# EAGLE board Jung (EAGLE 8.0.2)
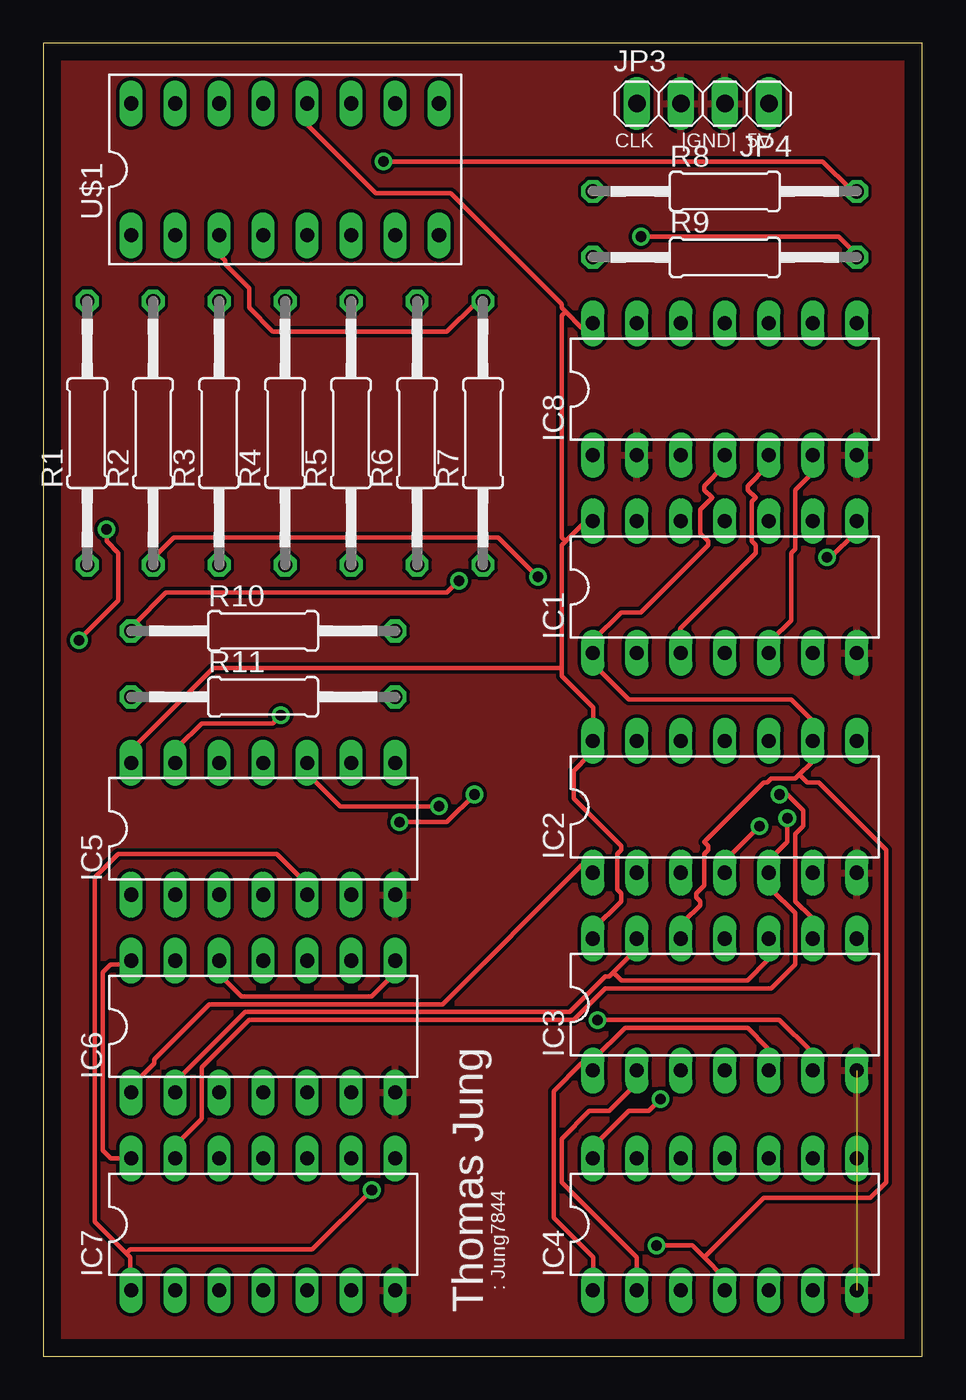
[diagram p0: board, top side]
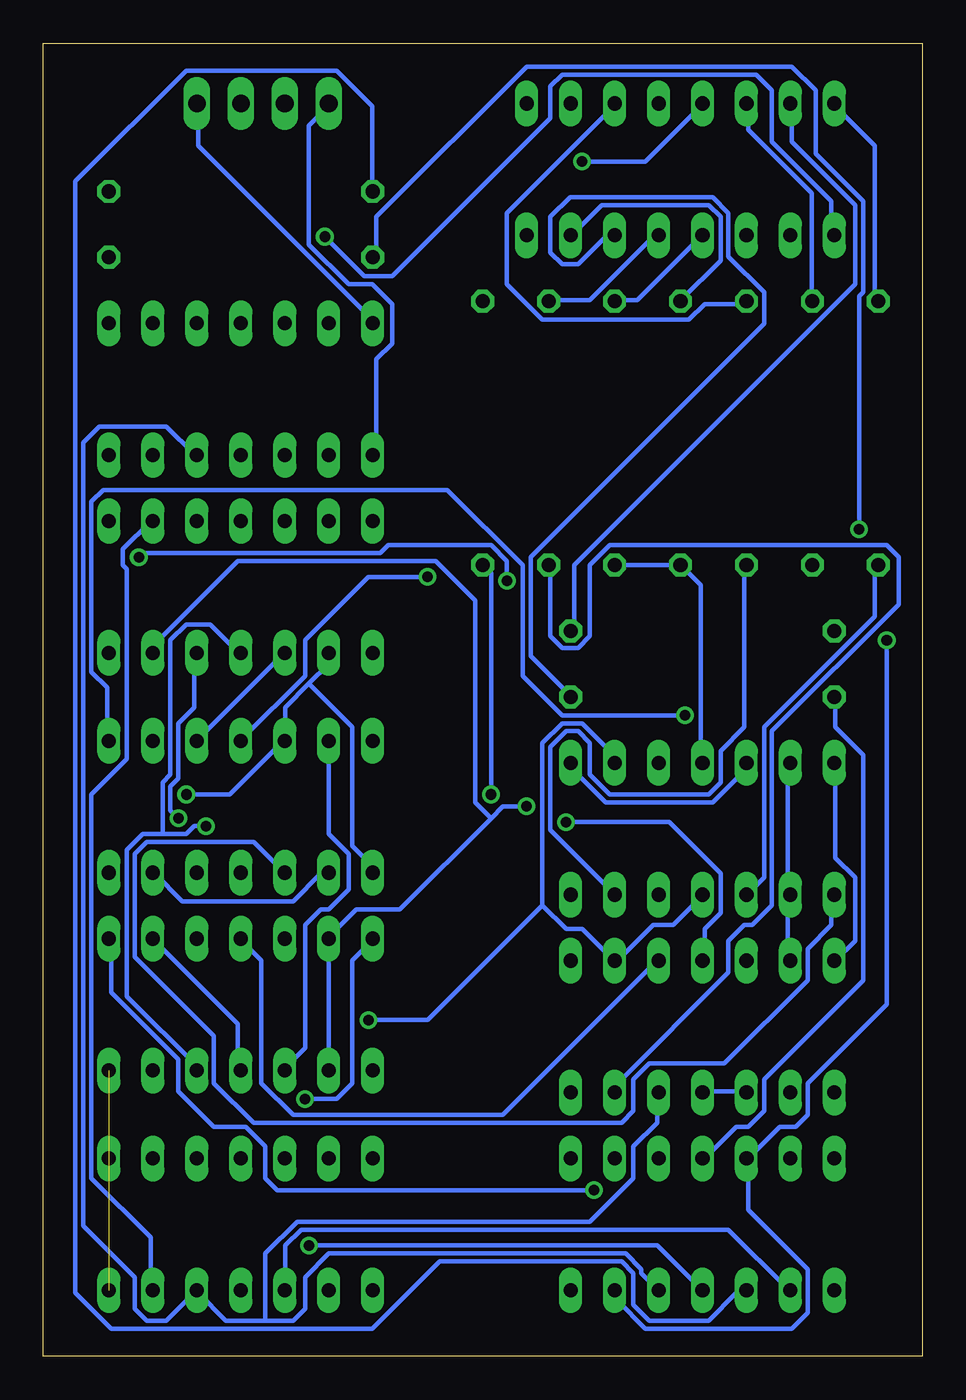
[diagram p1: board, bottom side, seen from below]

Size 50.78 x 75.87 mm. Coordinates in mm from the lower left corner, seen from the top.
Outline: 0,0 50.78,0 50.78,75.87 0,75.87 0,0
Copper layers (1*16): Top 0.035mm / dielectric 1.5mm / Bottom 0.035mm
Design rules "default": minimum track width 10mil, minimum drill 24mil, track to track 8mil, track to pad 8mil, pad to pad 8mil, via to via 8mil, smd to smd 8mil, copper to edge 40mil, drill to drill 8mil, minimum pad ring 10mil, minimum via ring 8mil, stop-mask expansion 4mil, vias tented up to drill 0mil, thermal gap 10mil

## Footprints (pad centres in the part's own frame; a part is rotated, then mirrored left to right if it is on the bottom)
DIL14 = drill 0.813 long: 1 -7.62,-3.81; 2 -5.08,-3.81; 3 -2.54,-3.81; 4 0,-3.81; 5 2.54,-3.81; 6 5.08,-3.81; 7 7.62,-3.81; 8 7.62,3.81; 9 5.08,3.81; 10 2.54,3.81; 11 0,3.81; 12 -2.54,3.81; 13 -5.08,3.81; 14 -7.62,3.81
1X02 = drill 1.016 long: 1 -1.27,0; 2 1.27,0
0207/15 = drill 0.813 octagon: 1 -7.62,0; 2 7.62,0
DIL16 = drill 0.813 long: 1 -8.89,-3.81; 2 -6.35,-3.81; 3 -3.81,-3.81; 4 -1.27,-3.81; 5 1.27,-3.81; 6 3.81,-3.81; 7 6.35,-3.81; 8 8.89,-3.81; 9 8.89,3.81; 10 6.35,3.81; 11 3.81,3.81; 12 1.27,3.81; 13 -1.27,3.81; 14 -3.81,3.81; 15 -6.35,3.81; 16 -8.89,3.81

## Placement (x,y rotation side)
IC1  74ALS04N  [DIL14]  39.37,44.45 0 top
IC2  74ALS08N  [DIL14]  39.37,31.75 0 top
IC3  74ALS08N  [DIL14]  39.37,20.32 0 top
IC4  74ALS08N  [DIL14]  39.37,7.62 0 top
IC5  74LS32N  [DIL14]  12.7,30.48 0 top
IC6  74LS32N  [DIL14]  12.7,19.05 0 top
IC7  74LS32N  [DIL14]  12.7,7.62 0 top
IC8  74LS393N  [DIL14]  39.37,55.88 0 top
JP3  [1X02]  35.56,72.39 0 top
JP4  [1X02]  40.64,72.39 180 top
R1  270  [0207/15]  2.54,53.34 90 top
R2  270  [0207/15]  6.35,53.34 90 top
R3  270  [0207/15]  10.16,53.34 90 top
R4  270  [0207/15]  13.97,53.34 90 top
R5  270  [0207/15]  17.78,53.34 90 top
R6  270  [0207/15]  21.59,53.34 90 top
R7  270  [0207/15]  25.4,53.34 90 top
R8  270  [0207/15]  39.37,67.31 0 top
R9  270  [0207/15]  39.37,63.5 0 top
R10  270  [0207/15]  12.7,41.91 0 top
R11  270  [0207/15]  12.7,38.1 0 top
U$1  PSA39-21EWA  [DIL16]  13.97,68.58 0 top

## Library data of the parts
IC1-IC8 = 74xx-us
JP3 JP4 = pinhead
R1-R11 = resistor
U$1 = ECE3773

## Nets
GND: IC1.7 IC2.7 IC3.7 IC4.7 IC5.7 IC6.7 IC7.7 IC8.2 IC8.7 JP3.2 JP4.2
N$1: IC1.1 IC2.9 IC3.12 IC4.4 IC7.4 IC8.4
N$2: IC1.3 IC2.10 IC4.5 IC6.5 IC7.5 IC8.5
N$3: IC1.5 IC2.5 IC7.13 IC8.6
N$4: IC1.2 IC2.1 IC2.12 IC3.4 IC3.9 IC6.1
N$5: IC1.4 IC2.4 IC3.1 IC3.5 IC4.1
N$6: IC1.6 IC3.2 IC3.10 IC3.13 IC4.2 IC5.10 IC6.2
N$7: IC2.8 IC5.2 IC5.13 IC6.13
N$8: IC3.6 IC5.4 IC5.9 IC6.9
N$9: IC2.13 IC3.3
N$10: IC3.8 IC5.5 IC7.1
N$11: IC2.2 IC2.6
N$12: IC2.3 IC5.1
N$13: IC5.3 R1.1
N$14: IC5.8 IC5.12
N$15: R1.2 U$1.16
N$16: IC6.3 IC6.4
N$17: IC3.11 IC6.10
N$18: IC6.8 IC6.12
N$19: IC2.11 R2.1
N$20: IC4.3 IC7.2
N$21: IC1.9 IC4.6
N$22: IC7.6 IC7.12 R9.1
N$23: R2.2 U$1.14
N$24: IC5.6 R3.1
N$25: R3.2 U$1.11
N$26: IC5.11 R4.1 R5.1
N$27: R4.2 U$1.7
N$28: IC6.6 R6.1
N$29: R5.2 U$1.4
N$30: R6.2 U$1.5
N$31: IC6.11 R7.1
N$32: R7.2 U$1.3
N$33: IC7.3 R8.1
N$34: R8.2 U$1.13
N$35: R9.2 U$1.1
N$36: IC1.8 R10.1
N$37: IC7.11 R11.1
N$38: R10.2 U$1.15
N$39: R11.2 U$1.6
N$40: IC8.1 JP3.1
VCC: IC1.14 IC2.14 IC3.14 IC4.14 IC5.14 IC6.14 IC7.14 IC8.14 JP4.1 U$1.12

## Tracks (layer width: path | path; a pad name or v marks a point on that pad's centre or on a via)
GND  (1 unrouted)
  pour Top: 0,76.2 0,0 50.8,0 50.8,76.2
N$1  (via drill 0.61)
  Top 0.254: v35.43,6.4 37.49,6.4 38.18,5.71 | 38.18,5.71 39.32,4.57 39.32,3.89 IC4.4 | 43.66,33.6 44.35,34.29 44.35,35.43 IC2.9 44.35,35.66 44.35,36.8 43.2,37.95 33.83,37.95 31.77,40.01 31.77,40.46 IC1.1 31.77,40.69 31.77,41.38 33.38,42.98 34.52,42.98 38.41,46.86 38.41,47.09 37.95,47.55 37.95,48.92 38.63,49.61 38.18,50.06 38.18,50.29 39.32,51.44 39.32,51.89 IC8.4 | 43.66,33.6 43.43,33.38 42.06,33.38 41.83,33.15 41.6,33.15 38.18,29.72 38.41,29.49 38.41,29.26 38.18,29.03 38.18,27.2 37.72,26.75 37.72,26.52 37.95,26.29 37.95,26.06 37.03,25.15 37.03,24.23 IC3.12 | 38.18,5.71 41.6,9.14 47.78,9.14 48.69,10.06 48.69,29.26 44.81,33.15 44.12,33.15 43.66,33.6
  Bottom 0.254: v35.43,6.4 15.32,6.4 12.8,3.89 IC7.4
N$2
  Top 0.254: IC8.5 41.83,51.89 41.83,51.44 40.69,50.29 40.69,50.06 41.15,49.61 40.92,49.38 40.92,47.09 41.15,46.86 41.15,46.41 36.8,42.06 36.8,40.69 IC1.3
  Bottom 0.254: IC2.10 41.83,35.66 37.03,40.46 IC1.3 | IC7.5 16.23,4.8 16.23,5.03 17.14,5.94 34.29,5.94 35.66,4.57 35.66,2.74 36.35,2.06 37.95,2.06 | 37.95,2.06 40.23,2.06 41.83,3.66 IC4.5 43.66,2.06 44.81,2.06 45.49,2.74 45.49,4.57 48.46,7.54 48.46,52.81 47.55,53.72 43.66,53.72 42.06,52.12 IC8.5 | 37.95,2.06 37.95,5.94 36.12,7.77 19.2,7.77 16.69,10.29 16.69,12.12 15.32,13.49 15.32,15.09 IC6.5
N$3  (via drill 0.61)
  Top 0.254: IC1.5 42.06,40.69 42.06,41.38 43.2,42.52 43.2,46.41 43.43,46.63 43.43,50.06 44.35,50.98 44.35,51.89 IC8.6 | IC7.13 7.77,11.43 7.77,12.34 9.14,13.72 9.14,16.69 11.89,19.43 30.63,19.43 32.46,21.26 42.06,21.26 43.43,22.63 43.43,25.6 42.06,26.98 42.06,27.89 IC2.5 42.06,28.12 42.06,28.8 42.98,29.72 v42.98,31.09
  Bottom 0.254: v42.98,31.09 43.43,31.55 43.43,32.92 42.98,33.38 42.98,36.58 42.06,37.49 42.06,40.46 IC1.5
N$4  (via drill 0.61)
  Top 0.254: IC6.1 5.26,15.32 5.26,15.77 6.4,16.92 6.4,17.14 9.6,20.34 23.09,20.34 31.09,28.35 31.32,28.35 31.55,28.12 IC2.1 | v42.52,32.46 42.98,32.46 43.89,31.55 43.89,30.63 43.43,30.18 43.43,26.29 44.35,25.38 44.35,24.23 IC3.9
  Bottom 0.254: IC3.4 39.55,16.69 39.55,19.2 44.35,24 IC3.9 | 35.43,38.86 34.29,40.01 IC1.2 | 35.43,38.86 36.8,37.49 36.8,35.66 IC2.12 37.03,35.43 40.01,32.46 v42.52,32.46 | 35.43,38.86 32.92,36.35 32.92,29.49 31.55,28.12 IC2.1
N$5  (via drill 0.61)
  Top 0.254: IC4.1 31.77,3.89 31.77,5.71 29.49,8 29.49,15.32 31.09,16.92 31.32,16.92 31.55,16.69 IC3.1 31.77,16.69 31.77,17.14 33.6,18.97 40.69,18.97 41.83,17.83 41.83,16.69 IC3.5 | v41.38,30.63 39.55,28.8 39.55,28.12 IC2.4
  Bottom 0.254: v41.38,30.63 42.06,30.63 42.52,30.18 43.89,30.18 | 43.89,30.18 45.03,30.18 45.95,29.26 45.95,20.8 41.83,16.69 IC3.5 | 43.89,30.18 43.89,33.15 43.43,33.6 43.43,41.38 42.52,42.29 41.15,42.29 39.55,40.69 IC1.4
N$6  (via drill 0.61)
  Top 0.254: IC4.2 34.29,5.71 29.95,10.06 29.95,12.57 31.55,14.17 32.69,14.17 34.29,15.77 IC3.2 | 32.92,22.17 34.29,23.55 IC3.13 | 32.92,22.17 32.69,21.95 32.46,21.95 30.4,19.89 11.66,19.89 7.77,16 7.77,15.32 IC6.2 | v22.86,31.77 17.14,31.77 15.32,33.6 15.32,34.29 IC5.10 | 32.92,22.17 33.38,21.72 40.69,21.72 41.83,22.86 41.83,24 IC3.10
  Bottom 0.254: v22.86,31.77 24.23,31.77 24.92,31.09 | 24.92,31.09 30.18,25.83 32.69,25.83 34.29,24.23 IC3.13 IC3.2 | 24.92,31.09 25.83,32 25.83,43.66 28.12,45.95 39.55,45.95 44.35,41.15 44.35,40.69 IC1.6
N$7  (via drill 0.61)
  Top 0.254: v13.72,37.03 13.26,36.58 9.14,36.58 7.77,35.2 7.77,34.29 IC5.13
  Bottom 0.254: IC6.13 7.77,22.86 7.77,26.52 IC5.2 7.77,26.75 7.77,34.29 IC5.13 | v13.72,37.03 20.8,37.03 23.09,39.32 23.09,45.72 27.43,50.06 47.32,50.06 48.01,49.38 48.01,39.55 47.09,38.63 47.09,35.66 IC2.8
N$8  (via drill 0.61)
  Top 0.254: v32,19.43 42.52,19.43 44.35,17.6 44.35,16.69 IC3.6
  Bottom 0.254: IC5.4 12.8,26.52 14.4,24.92 15.54,24.92 17.6,22.86 IC6.9 17.83,22.86 19.66,24.69 20.57,24.69 21.95,26.06 | 21.95,26.06 21.95,35.43 20.8,36.58 19.66,36.58 17.83,34.75 17.83,34.29 IC5.9 | v32,19.43 28.57,19.43 21.95,26.06
N$9
  Bottom 0.254: IC2.13 34.29,30.18 33.15,29.03 33.15,26.98 34.29,25.83 34.75,25.83 35.66,24.92 35.66,17.83 36.8,16.69 IC3.3
N$10  (via drill 0.61)
  Top 0.254: 4.8,5.94 2.97,7.77 2.97,27.66 4.34,29.03 13.49,29.03 15.09,27.43 15.09,26.75 IC5.5 | 4.8,5.94 5.03,5.71 5.03,3.89 IC7.1 | v18.97,9.6 15.54,6.17 5.03,6.17 4.8,5.94
  Bottom 0.254: v18.97,9.6 37.26,9.6 37.95,10.29 37.95,12.12 39.09,13.26 40.92,13.26 42.98,15.32 42.98,17.14 46.86,21.03 46.86,24 IC3.8
N$11
  Bottom 0.254: IC2.2 34.29,27.89 34.75,27.89 36.35,26.29 42.75,26.29 44.35,27.89 IC2.6
N$12
  Bottom 0.254: IC5.1 5.26,26.52 5.26,24.92 6.63,23.55 6.63,21.72 11.43,16.92 15.77,16.92 16.69,16 16.69,14.17 17.37,13.49 38.63,13.49 40.92,15.77 40.92,18.52 45.49,23.09 45.49,29.03 44.81,29.72 38.63,29.72 37.03,28.12 IC2.3
N$13
  Bottom 0.254: R1.1 2.74,45.72 2.74,42.75 9.14,36.35 9.14,27.66 10.06,26.75 IC5.3
N$14
  Bottom 0.254: IC5.12 10.29,34.29 10.29,33.83 12.12,32 18.29,32 20.12,33.83 20.12,34.29 IC5.8
N$15
  Bottom 0.254: R1.2 2.74,61.04 2.74,69.95 5.03,72.24 U$1.16
N$16
  Bottom 0.254: IC6.3 10.29,15.32 12.57,15.32 IC6.4
N$17
  Bottom 0.254: IC6.10 15.32,22.86 24.23,13.95 36.35,13.95 38.18,15.77 38.18,22.86 39.32,24 IC3.11
N$18
  Top 0.254: IC6.12 10.29,22.86 10.29,21.95 11.43,20.8 18.97,20.8 20.12,21.95 20.12,22.86 IC6.8
N$19  (via drill 0.61)
  Top 0.254: v28.57,45.03 26.29,47.32 7.54,47.32 6.4,46.18 6.4,45.72 R2.1
  Bottom 0.254: v28.57,45.03 32,45.03 35.66,41.38 35.66,39.32 39.32,35.66 IC2.11
N$20
  Bottom 0.254: IC7.2 7.77,3.89 11.2,7.32 35.89,7.32 36.8,6.4 36.8,3.89 IC4.3
N$21
  Bottom 0.254: IC4.6 44.58,3.89 44.58,6.86 48.01,10.29 48.01,32.46 45.95,34.52 45.95,45.49 46.18,45.72 46.18,46.63 44.58,48.23 IC1.9
N$22  (via drill 0.61)
  Top 0.254: v3.66,47.78 3.66,47.09 4.34,46.41 4.34,43.66 v2.06,41.38
  Bottom 0.254: 10.06,11.43 10.06,8.46 6.63,5.03 6.63,2.52 7.54,1.6 16,1.6 17.6,3.2 17.6,3.66 IC7.6 | v3.66,47.78 3.66,61.27 3.43,61.49 3.43,66.75 6.17,69.49 6.17,73.15 7.54,74.52 22.86,74.52 31.55,65.84 31.55,63.55 R9.1 | v2.06,41.38 2.06,20.34 6.63,15.77 6.63,13.95 7.32,13.26 8.23,13.26 10.06,11.43 | 10.06,11.43 IC7.12
N$23
  Bottom 0.254: R2.2 6.4,61.04 6.4,67.21 10.06,70.87 10.06,72.24 U$1.14
N$24
  Bottom 0.254: R3.1 10.29,45.72 10.29,36.35 11.66,34.98 11.66,33.15 12.34,32.46 18.06,32.46 19.2,33.6 19.2,35.43 19.89,36.12 20.57,36.12 21.49,35.2 21.49,30.4 17.83,26.75 IC5.6
N$25
  Bottom 0.254: R3.2 10.29,60.81 12.57,60.81 13.49,59.89 21.95,59.89 24,61.95 24,66.06 17.83,72.24 U$1.11
N$26
  Bottom 0.254: IC5.11 12.8,34.29 12.8,44.58 13.95,45.72 R4.1 R5.1
N$27
  Bottom 0.254: R4.2 13.95,61.04 11.66,63.32 11.66,65.84 12.34,66.52 18.52,66.52 20.12,64.92 U$1.7
N$28
  Bottom 0.254: IC6.6 17.6,15.32 17.6,15.77 11.2,22.17 11.2,24 10.29,24.92 9.83,24.92 8.69,26.06 8.69,36.12 1.37,43.43 1.37,46.18 2.06,46.86 18.06,46.86 19.2,45.72 19.2,41.6 19.89,40.92 20.8,40.92 21.49,41.6 21.49,45.72 R6.1
N$29
  Bottom 0.254: R5.2 17.6,61.04 16.46,61.04 12.8,64.69 U$1.4
N$30
  Bottom 0.254: R6.2 21.49,61.04 19.2,61.04 15.32,64.92 U$1.5
N$31  (via drill 0.61)
  Top 0.254: v20.57,30.86 23.32,30.86 v24.92,32.46
  Bottom 0.254: v20.57,30.86 14.63,30.86 11.66,27.89 11.66,25.6 12.57,24.69 12.57,22.86 IC6.11 | v24.92,32.46 24.92,45.26 25.38,45.72 R7.1
N$32
  Top 0.254: R7.2 25.38,60.81 24.92,60.81 23.32,59.21 13.26,59.21 11.89,60.58 11.89,61.72 10.52,63.09 10.52,63.32 10.29,63.55 10.29,64.69 U$1.3
N$33
  Bottom 0.254: IC7.3 10.29,3.66 10.74,3.66 12.34,2.06 15.77,2.06 16.69,2.97 16.69,4.8 17.37,5.49 27.89,5.49 31.77,1.6 46.86,1.6 48.92,3.66 48.92,67.89 42.52,74.3 33.83,74.3 31.77,72.24 31.77,67.44 R8.1
N$34  (via drill 0.61)
  Top 0.254: v19.66,69.04 45.03,69.04 46.63,67.44 46.86,67.44 R8.2
  Bottom 0.254: v19.66,69.04 16,69.04 12.8,72.24 U$1.13
N$35  (via drill 0.61)
  Top 0.254: v34.52,64.69 45.95,64.69 46.86,63.78 46.86,63.55 R9.2
  Bottom 0.254: v34.52,64.69 32.23,62.41 30.63,62.41 21.49,71.55 21.49,73.38 20.8,74.07 9.6,74.07 8.69,73.15 8.69,70.18 5.26,66.75 5.26,64.92 U$1.1
N$36  (via drill 0.61)
  Top 0.254: v24,44.81 23.32,44.12 7.09,44.12 5.26,42.29 5.26,42.06 R10.1 | v45.26,46.18 45.49,46.18 46.86,47.55 46.86,48.23 IC1.8
  Bottom 0.254: v24,44.81 24,45.95 24.92,46.86 30.86,46.86 31.32,46.41 45.03,46.41 v45.26,46.18
N$37
  Bottom 0.254: R11.1 5.03,37.95 5.03,36.35 3.43,34.75 3.43,21.72 9.14,16 9.14,14.17 10.06,13.26 10.74,13.26 12.57,11.43 IC7.11
N$38
  Bottom 0.254: R10.2 20.12,42.06 20.12,45.72 3.89,61.95 3.89,66.52 7.54,70.18 7.54,72.24 U$1.15
N$39
  Bottom 0.254: U$1.6 17.83,64.69 18.29,64.69 19.89,63.09 20.8,63.09 21.49,63.78 21.49,65.84 20.34,66.98 12.12,66.98 11.2,66.06 11.2,63.55 9.14,61.49 9.14,59.66 22.63,46.18 22.63,40.46 20.34,38.18 R11.2
N$40
  Bottom 0.254: IC8.1 31.55,52.12 31.55,57.61 30.63,58.52 30.63,60.81 31.77,61.95 33.15,61.95 35.43,64.24 35.43,71.09 34.29,72.24 JP3.1
VCC  (via drill 0.61)
  Top 0.254: IC7.14 3.89,11.43 3.43,11.89 3.43,22.17 3.89,22.63 4.8,22.63 5.03,22.86 IC6.14 | v35.66,14.86 34.98,14.17 33.83,14.17 31.77,12.12 31.77,11.43 IC4.14 | 29.95,39.78 29.95,46.86 30.18,47.09 | 29.95,39.78 29.95,39.32 31.77,37.49 31.77,35.66 IC2.14 31.55,35.43 31.55,34.75 30.63,33.83 30.63,32.23 33.38,29.49 33.38,29.26 33.15,29.03 33.15,26.98 33.38,26.75 33.38,26.29 31.77,24.69 31.77,24.23 IC3.14 | 30.18,47.09 31.55,48.46 IC1.14 | 30.18,60.35 31.09,59.44 31.32,59.44 31.55,59.66 IC8.14 | 30.18,60.35 29.95,60.58 29.95,60.81 23.55,67.21 19.2,67.21 15.32,71.09 15.32,72.24 U$1.12 | 30.18,47.09 29.95,47.32 29.95,60.12 30.18,60.35 | 29.95,39.78 9.83,39.78 5.26,35.2 5.26,34.29 IC5.14
  Bottom 0.254: IC5.14 5.03,34.29 5.03,28.8 3.89,27.66 3.89,24 5.03,22.86 IC6.14 | v35.66,14.86 33.83,14.86 32.92,15.77 32.92,22.86 31.77,24 IC3.14 | JP4.1 41.83,72.24 41.83,69.95 31.77,59.89 IC8.14

## Text on the board
tPlace: CLK | |GND| | 5V | : Jung7844 | Thomas Jung